# Altium PCB FDMXComunicationModule.PcbDoc
Units mm, origin at the board's own origin, x right, y up, seen from the top; angles counter-clockwise.
Board outline 25.91 x 33.53 mm, 2 copper layers (Top Layer, Bottom Layer); 16 components, 15 nets, 68 pads, 31 vias.
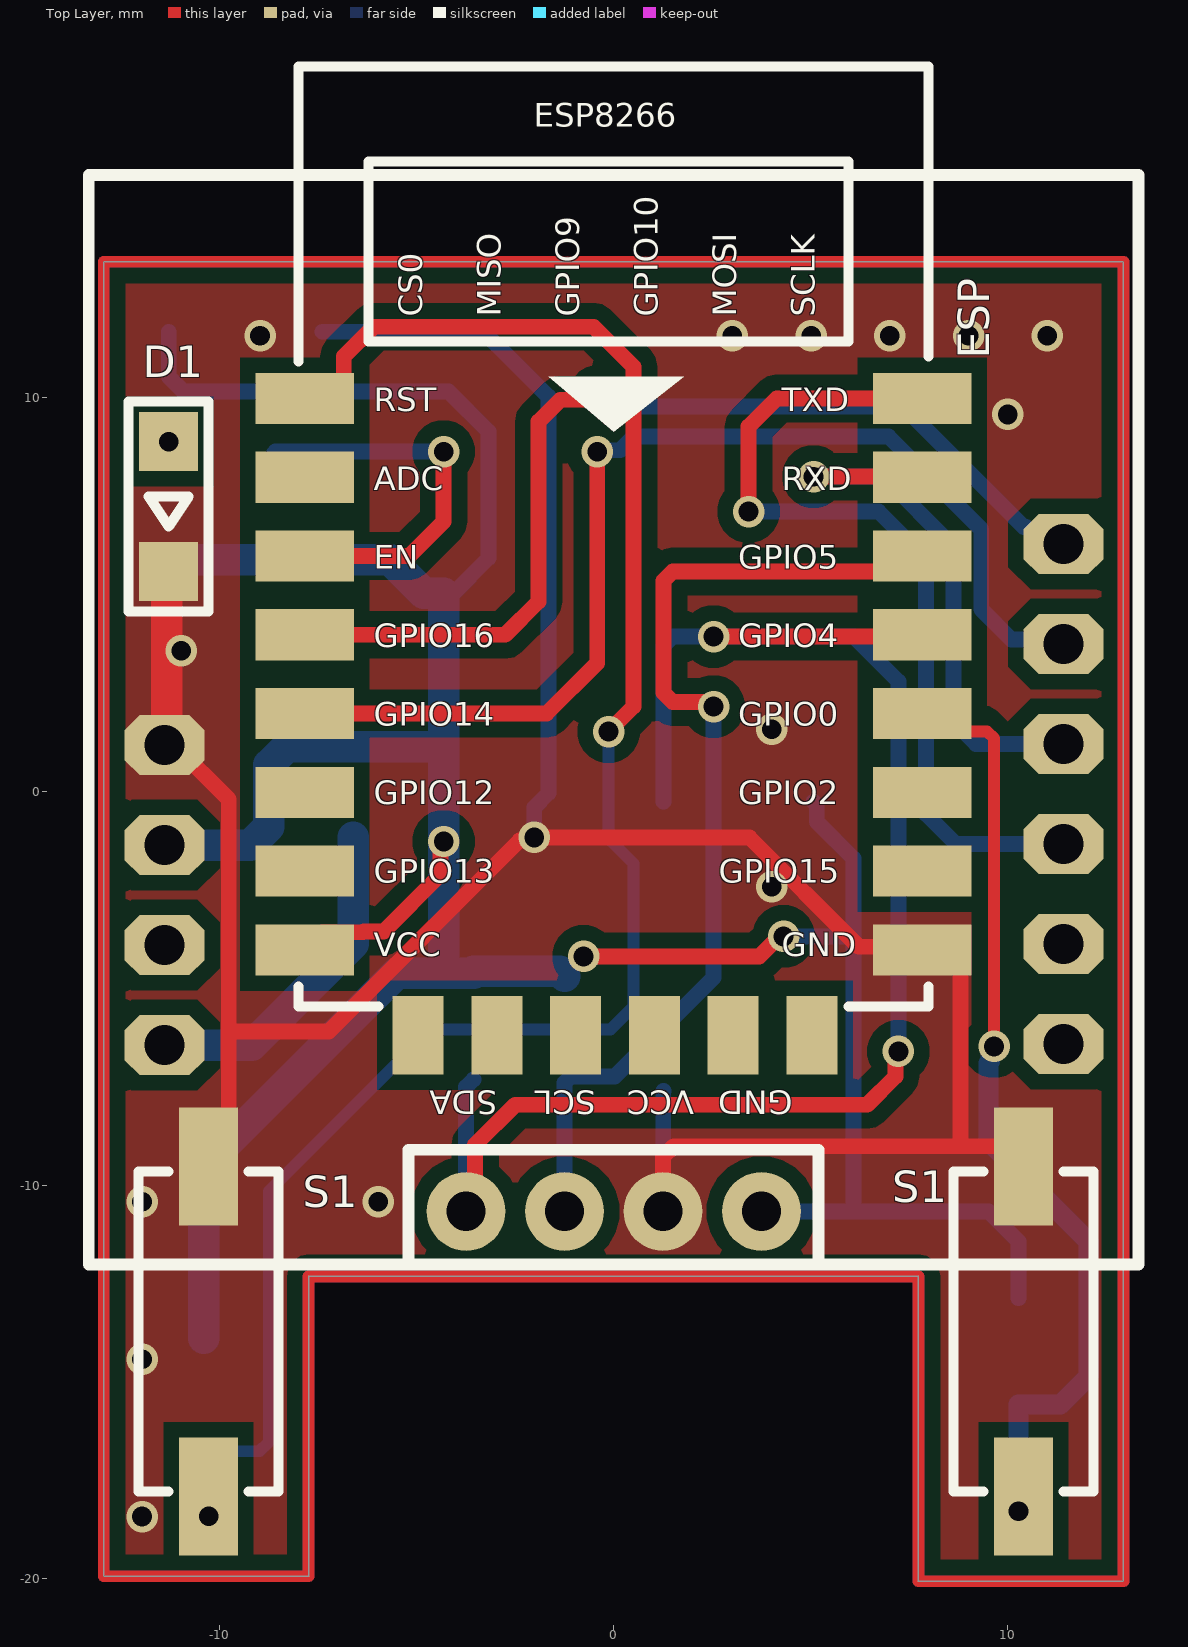
[diagram p0: Top Layer view]
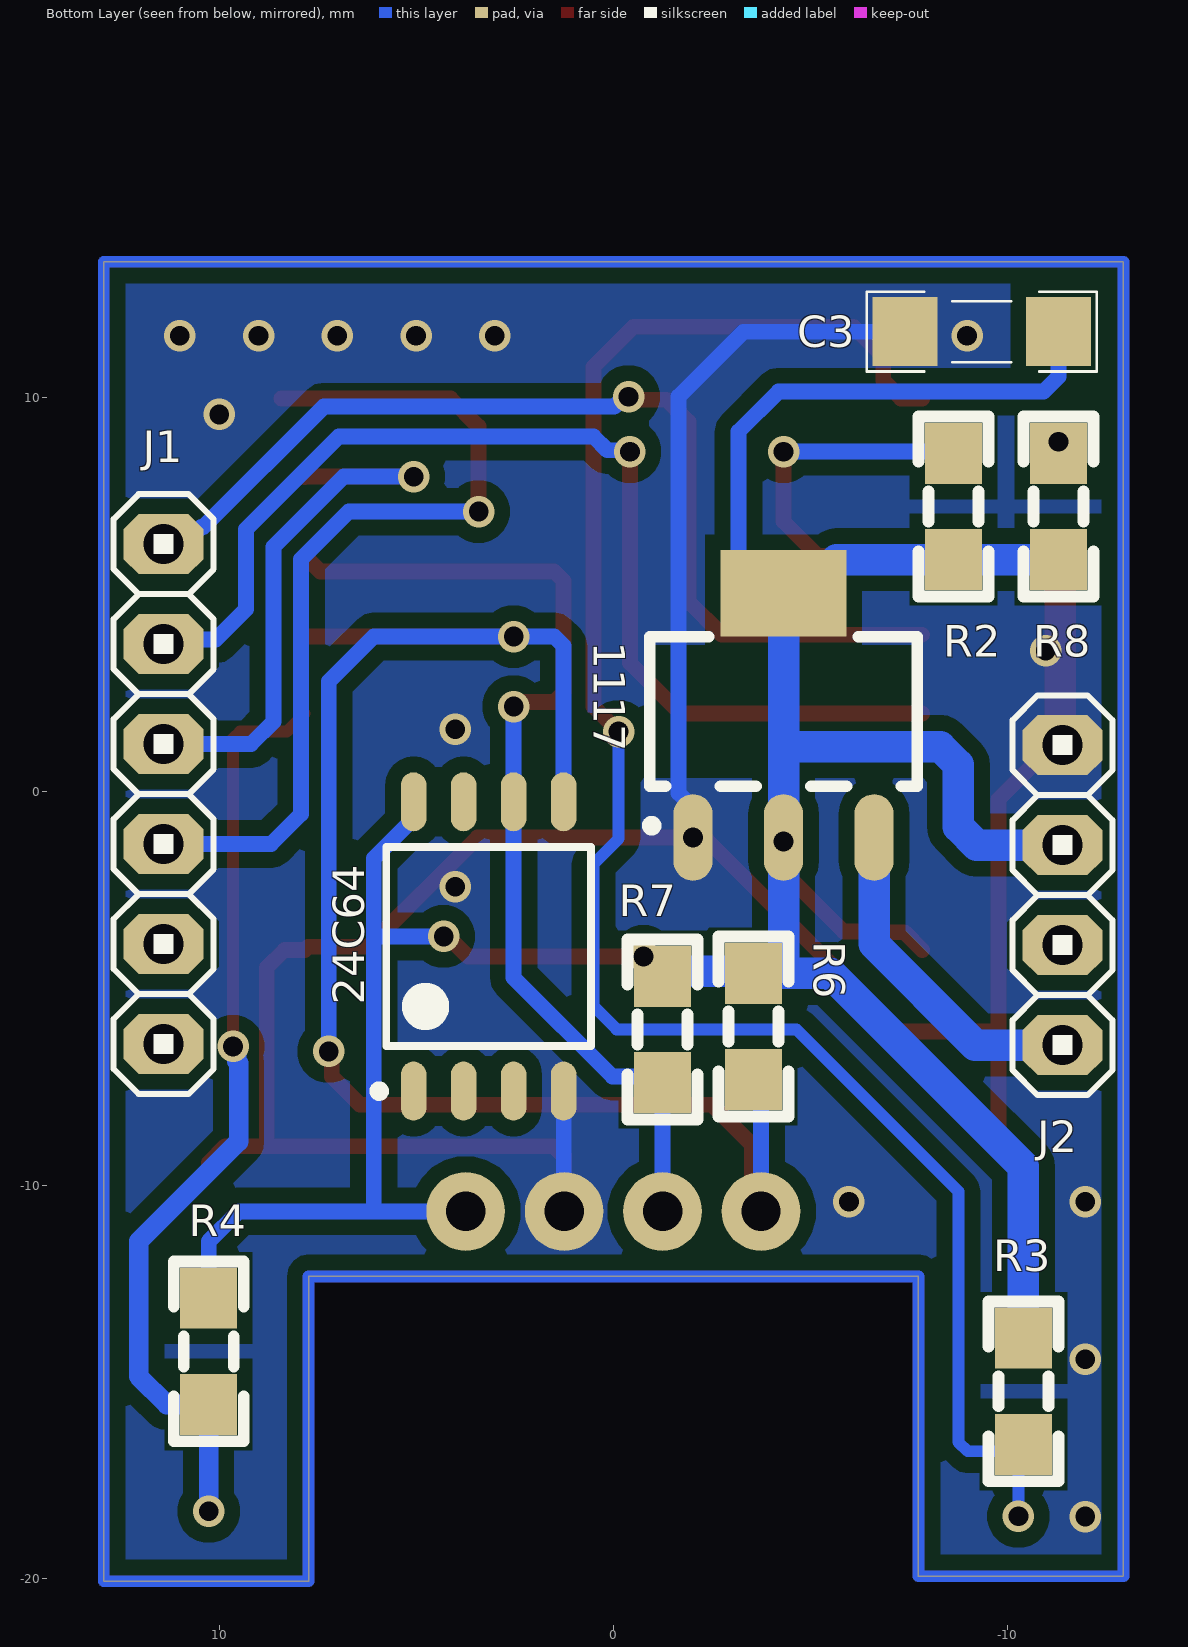
[diagram p1: Bottom Layer view, seen from below]
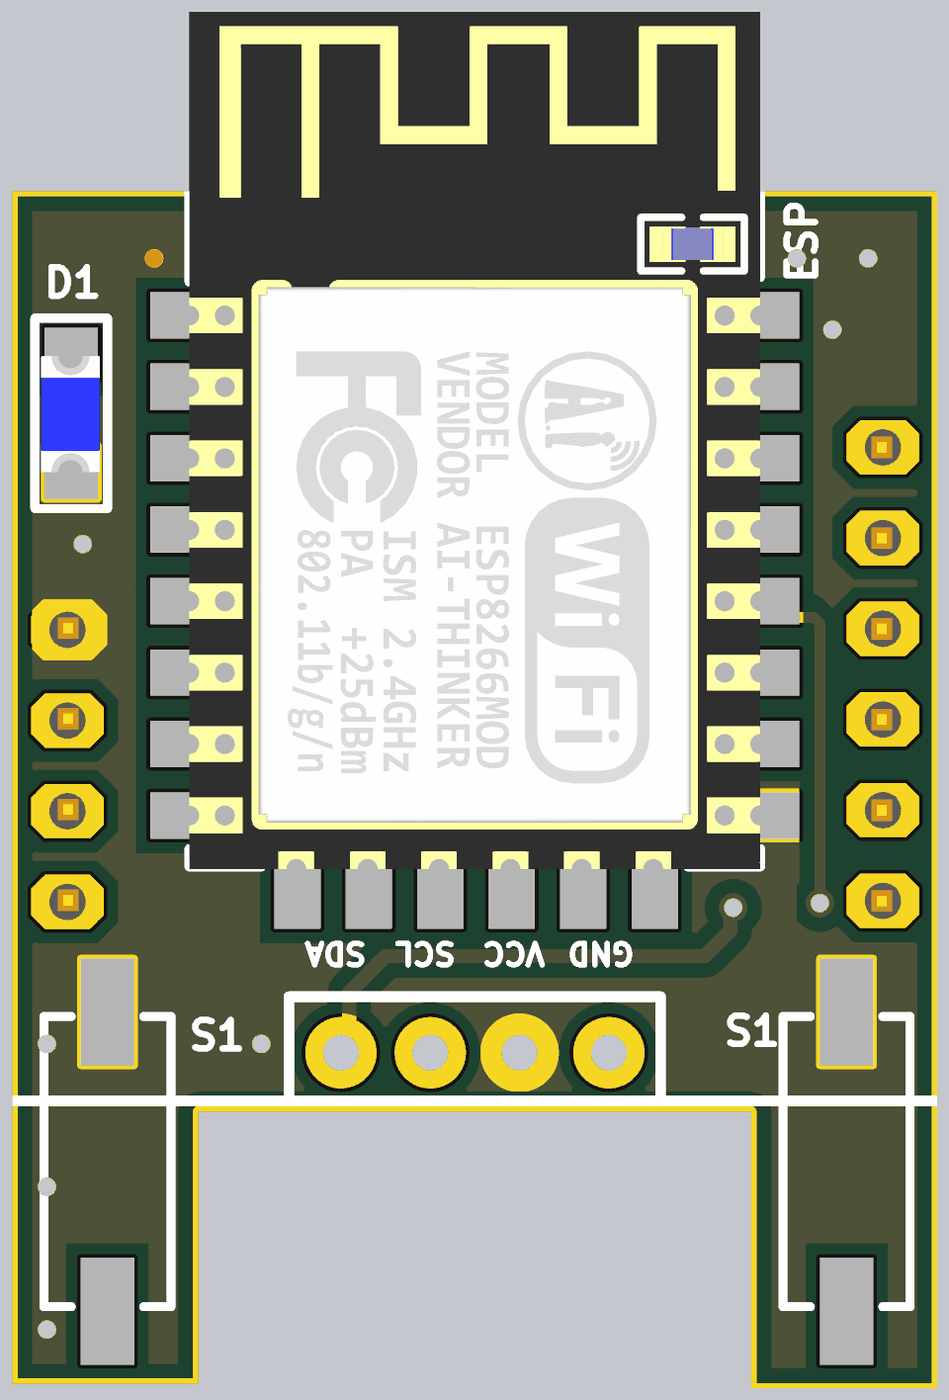
[diagram p2: 3D render of the assembled board from above, using the file's embedded part models]
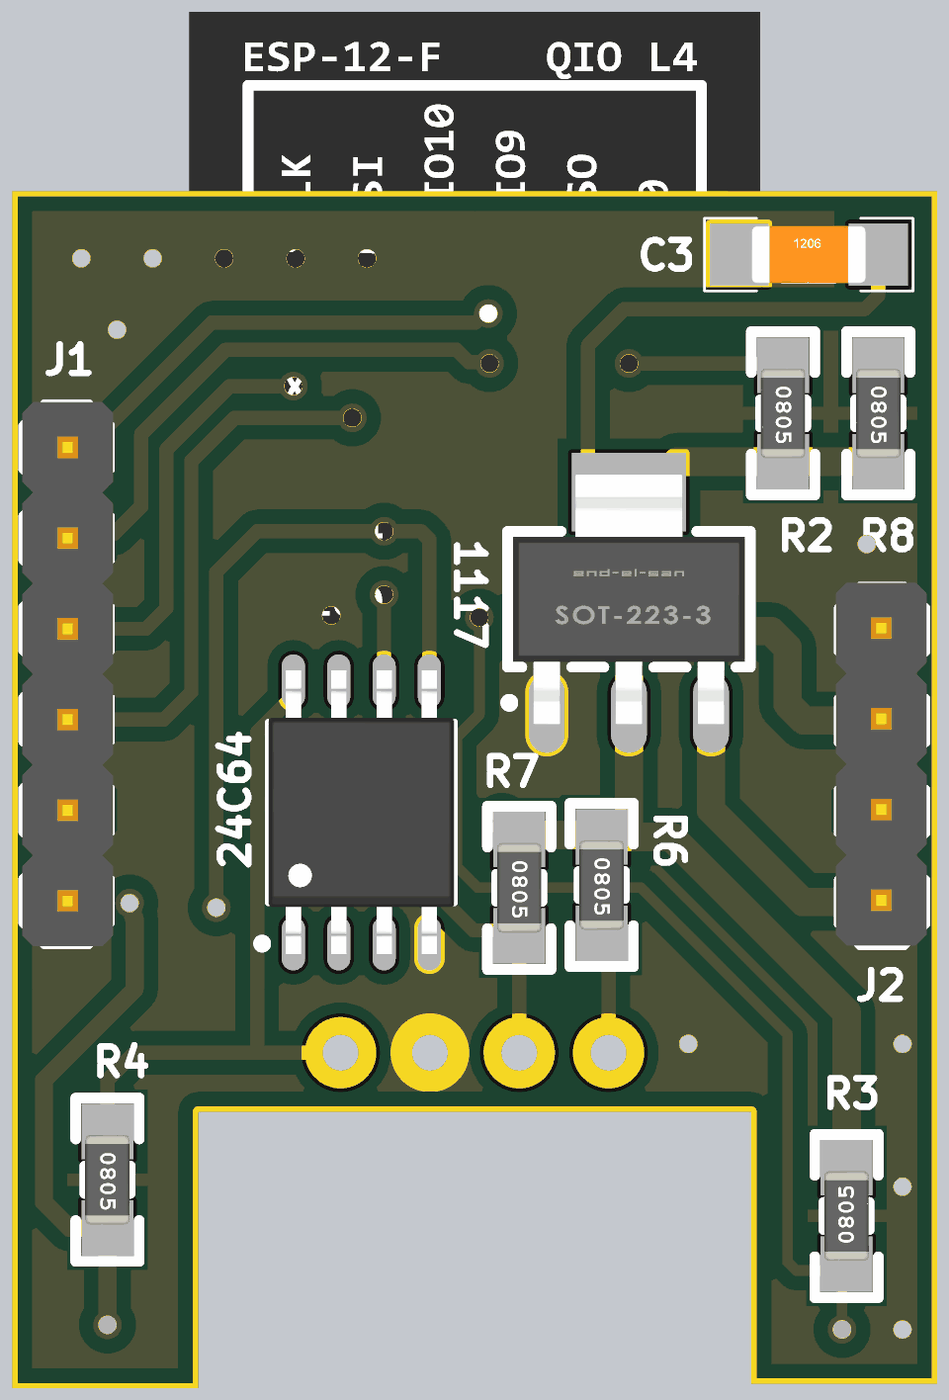
[diagram p3: 3D render of the assembled board from below, using the file's embedded part models]

## Layer stack, top to bottom
Top Solder: solder mask 0.0102, Solder Resist, Dk 3.5
Top Layer: signal copper 0.0356
Dielectric 1: dielectric 0.32, FR-4, Dk 4.8
Bottom Layer: signal copper 0.0356
Bottom Solder: solder mask 0.0102, Solder Resist, Dk 3.5

## Board outline
-12.954,-19.939 -12.954,13.462 12.954,13.462 12.954,-20.066 7.747,-20.066 7.747,-12.319 -7.747,-12.319 -7.747,-19.939

## Design rules (kind name [scope] priority, off if disabled: settings)
Clearance [All] p1: gap=0.4 ignorepadtopadclearanceinfootprint=FALSE except(0: Arc-Hole Track-Hole SMDPad-Hole THPad-Hole Via-Hole Fill-Hole Poly-Hole Region-Hole Text-Hole; 0.254: Arc-THPad Arc-Via Arc-Text Track-THPad Track-Via Track-Text SMDPad-THPad SMDPad-Via SMDPad-Text THPad-THPad THPad-Via THPad-Text Via-Via Via-Text Fill-Text Poly-Text Region-Text Text-Text; 0.3: Arc-Arc Arc-Track Arc-SMDPad Track-Track Track-SMDPad SMDPad-SMDPad)
PlaneConnect [All] p1: planeconnectstyle=Direct reliefexpansion=0.508 reliefentries=4 reliefconductorwidth=0.254 reliefairgap=0.254
PolygonConnect [All] p1: connectstyle=Direct reliefconductorwidth=0.8 reliefentries=4 polygonreliefangle="90 Angle" airgapwidth=0.254
RoutingVias [All] p1: holewidth=0.5 width=0.8 viastyle="Through Hole" minholewidth=0.5 minwidth=0.8 maxholewidth=0.6 maxwidth=1
SolderMaskExpansion [All] p1: expansion=0.102 istentingtop=FALSE
Width [All] p1: maxlimit=10 minlimit=0.3 preferedwidth=1
29 further rules are at their usual default settings.

## Components (designator, comment, footprint, x,y, rotation, side; value= is the part's Value field where it differs from the comment)
24C64 "Comment" 24C64 3.175,-3.937 r90 bottom
1117 "Comment" SOT223 -4.318,2.032 r90 bottom
C3 "Comment" CAPC4817X12N -9.353,11.684 r180 bottom
D1 "Comment" "LED BLUE 1206" -11.303,7.239 r270 top
ESP "Comment" ESP8266 0,6.223 r0 top locked
J1 "Comment" My_1X06 11.433,-0.065 r90 bottom locked
J2 "Comment" My_1X04 -11.407,-2.634 r90 bottom locked
R2 "Comment" RESC3413X04N -8.636,7.239 r270 bottom
R3 "Comment" RESC3413X04N -10.414,-15.24 r90 bottom
R4 "Comment" RESC3413X04N 10.287,-14.224 r270 bottom
R6 "Comment" RESC3413X04N -3.556,-5.969 r270 bottom
R7 "Comment" RESC3413X04N -1.246,-6.049 r270 bottom
R8 "Comment" RESC3413X04N -11.303,7.239 r270 bottom
S1 "Comment" pushbutton -10.287,-13.716 r90 top
S1 "Comment" pushbutton 10.414,-13.716 r90 top
? "Comment" "OLED 0.96inch" 0,1.822 r180 top locked

## Footprints (in the part's own frame and the unit in brackets; to place one, negate y for a bottom-side part, rotate by r counter-clockwise, add the part's x,y. Pads: shape width x height; smd on the part's side, far side on the other; paste and mask are expansions set on the pad)
24C64 [mm] "SOIC, 8-Leads, Body 5.21x5.28mm, Pitch 1.27mm, IPC Medium Density"
  oval 1.5x0.65 smd: 1(-3.675,1.905) 2(-3.675,0.635) 3(-3.675,-0.635) 4(-3.675,-1.905) 5(3.675,-1.905) 6(3.675,-0.635) 7(3.675,0.635) 8(3.675,1.905)
  silkscreen extent -3.8,-2.6 2.53,2.91, body extent -3.98,-2.6 3.98,2.6, height 1.97
CAPC4817X12N [mm] "Chip Capacitor, 2-Leads, Body 4/80x1/70mm, IPC Medium Density-Design:Abbas Basereh"
  rect 1.65x1.75 smd: 1(-1.95,0) 2(1.95,0)
  silkscreen extent -2.92,-1.02 2.92,1.02, body extent -1.6,-0.8 1.6,0.8, height 1
ESP8266 [mm]
  rect 2.5x1.3 smd: 1(-7.845,3.763) 2(-7.845,1.761) 3(-7.845,-0.24) 4(-7.845,-2.242) 5(-7.845,-4.243) 6(-7.845,-6.244) 7(-7.845,-8.246) 8(-7.845,-10.247) 15(7.845,-10.247) 16(7.845,-8.246) 17(7.845,-6.244) 18(7.845,-4.243) 19(7.845,-2.242) 20(7.845,-0.24) 21(7.845,1.761) 22(7.845,3.763)
  rect 1.3x2 smd: 9(-4.967,-12.417) 10(-2.965,-12.417) 11(-0.964,-12.417) 12(1.037,-12.417) 13(3.039,-12.417) 14(5.04,-12.417)
  silkscreen extent -8,-11.68 8,12.19, body extent -8,-11.75 8,12.25, height 3.17
"LED BLUE 1206" [mm]
  rect 1.5x1.5 smd: 1(-1.651,0) 2(1.651,0)
  silkscreen extent -2.67,-1.02 2.67,1.02, body extent -1.61,-0.85 1.66,0.8, height 0.9
My_1X04 [mil]
  oct 60x80 hole 40: 1(-150,0) 2(-50,0) 3(50,0) 4(150,0)
  silkscreen extent -200,-50 200,50, body extent -198,-49 202,51, height 234
My_1X06 [mil]
  oct 60x80 hole 40: 1(-250,0) 2(-150,0) 3(-50,0) 4(50,0) 5(150,0) 6(250,0)
  silkscreen extent -300,-50 300,50, body extent -300,-51 300,49, height 234
"OLED 0.96inch" [mm]
  round 2 hole 1: 1(-3.758,12.49) 2(-1.256,12.49) 3(1.246,12.49) 4(3.748,12.49)
  silkscreen extent -13.34,-13.84 13.34,13.84, body extent -13.5,-14 13.5,14, height 8.01
pushbutton [mm]
  rect 3x1.5 smd: 1(-4.191,0) 2(4.191,0)
  silkscreen extent -4.06,-1.78 4.06,1.78, body extent -4.17,-1.82 4.17,1.82, height 4.25
RESC3413X04N [mm] "Chip Resistor, 2-Leads, Body 3/40x1/30mm, IPC Medium Density-Design:Abbas Basereh"
  rect 1.55x1.45 smd: 1(-1.35,0) 2(1.35,0)
  silkscreen extent -2.29,-0.89 2.29,0.89, body extent -1.25,-0.62 1.25,0.62, height 0.79
SOT223 [mm] "SOT223, 4-Leads, Body 6.5x3.5mm, Pitch 2.30mm-Designer Abbas Basereh"
  oval 2.2x1 smd: 1(-3.2,2.3) 2(-3.2,0) 3(-3.2,-2.3)
  rect 2.2x3.2 smd: 4(3,0)
  Top Layer pour cut-out: -1.7,3.556 1.7,3.556 1.7,-3.556 -1.7,-3.556
  silkscreen extent -3.02,-3.4 1.9,3.48, body extent -3.5,-3.25 3.5,3.25, height 1.7

## Via types
v1: diameter 0.8, hole 0.5, Top Layer to Bottom Layer, tented both sides, 31 vias

## Nets (pads, with @x,y where several pads share a name; then routed paths per layer and width w, separated by ;. In a path a pad name is that pad's centre, name@x,y a point inside that pad or via, vN(x,y) a via of type N, cw(c..) or ccw(c..) an arc to the next point about the centre after c; other vN are vias at no path point)
5v: 
BOOT: 
EN: ESP.3 R2.1 | length 10
  Top Layer w0.4: ESP.3 -5.193,5.983 -4.318,6.858 v1(-4.318,8.636)
  Bottom Layer w0.4: R2.1 -8.589,8.636 v1(-4.318,8.636)
FLASH: ESP.18 R4.2 S1.1@10.414,-17.907 | length 24.2
  Top Layer w0.3: ESP.18 8.301,1.524 9.491,1.524 9.667,1.348 v1(9.667,-6.477)
  Bottom Layer w0.5: v1(9.667,-6.477) 9.571,-6.573 9.571,-6.857 9.525,-6.903 9.525,-8.89 12.065,-11.43 12.065,-14.859 11.35,-15.574 R4.2 v1(10.287,-18.288)
GND: 24C64.4 1117.1 ?.2 C3.1 D1.2 ESP.15 J2.4 S1.2 | length 74.3
  Top Layer w0.4: J2.4 -11.153,1.176 -9.779,-0.199 -9.779,-6.096 ; S1.2@-10.287,-9.525 -9.779,-9.017 -9.779,-6.096 ; ?.2 1.256,-9.285 1.527,-9.014 8.813,-9.014 ; S1.2@10.287,-9.437 9.864,-9.014 8.813,-9.014 ; -9.779,-6.096 -7.239,-6.096 -2.388,-1.245 -2.095,-1.245 v1(-2.018,-1.168) 3.454,-1.168 6.23,-3.944 7.765,-3.944 ESP.15 8.363,-4.024 8.813,-4.474 8.813,-9.014
  Top Layer w0.8: J2.4 -11.355,1.228 -11.355,5.536 D1.2
  Bottom Layer w0.4: C3.1 -3.302,11.684 -1.651,10.033 -1.651,-0.039 -2.018,-0.406 v1(-2.018,-1.168) ; ?.2 1.263,-10.661 1.263,-7.619 24C64.4
  other v1: -11.981,-18.421 -11.981,-14.421 -11.981,-10.421 -5.981,-10.421 4.019,-2.421 4.019,1.579 -10.981,3.579 10.019,9.579 -8.981,11.579 3.019,11.579 5.019,11.579 7.019,11.579 9.019,11.579 11.019,11.579
OUT1: ESP.4 J1.6 | length 26
  Top Layer w0.4: ESP.4 -2.75,3.981 -1.905,4.826 -1.905,9.398 -1.347,9.956 -0.458,9.956 v1(-0.381,10.033)
  Bottom Layer w0.4: v1(-0.381,10.033) -0.273,10.033 -0.019,9.779 7.366,9.779 10.424,6.721 10.478,6.721 10.915,6.285 J1.6
OUT2: ESP.5 J1.5 | length 28.7
  Top Layer w0.4: ESP.5 -1.703,1.98 -0.416,3.267 v1(-0.416,8.636)
  Bottom Layer w0.4: v1(-0.416,8.636) -0.38,8.672 0.163,8.672 0.508,9.017 6.985,9.017 9.339,6.663 9.339,4.631 10.106,3.864 11.313,3.864 J1.5
RES1: D1.1 R8.1
  other v1: -11.303,8.89
RST: ESP.1 R3.1 S1.1@-10.287,-17.907 | length 47.8
  Top Layer w0.4: ESP.1 -7.303,9.986 -6.853,10.436 -6.853,11.054 -6.096,11.811 -0.508,11.811 0.508,10.795 0.508,2.159 v1(-0.127,1.524)
  Bottom Layer w0.3: R3.1 R3.1@-10.287,-16.717 ; v1(-10.287,-18.415) R3.1@-10.287,-16.717 ; v1(-0.127,1.524) -0.127,-1.197 0.508,-1.832 0.508,-5.461 -0.075,-6.044 -4.647,-6.044 -8.763,-10.16 -8.763,-16.53 -8.997,-16.764 -10.24,-16.764 R3.1@-10.287,-16.717
RX: ESP.21 J1.4 | length 14.5
  Top Layer w0.4: v1(5.08,8.001) 7.829,8.001 ESP.21
  Bottom Layer w0.4: v1(5.08,8.001) 6.858,8.001 8.639,6.22 8.639,1.775 9.209,1.205 J1.4
SCL: 24C64.6 ?.3 ESP.20 R7.2 | length 26.1
  Top Layer w0.4: v1(2.54,2.159) 2.425,2.274 1.504,2.274 1.27,2.508 1.27,5.354 1.504,5.588 7.451,5.588 ESP.20
  Bottom Layer w0.4: ?.3 R7.2 -1.088,-7.241 0.028,-7.241 2.54,-4.729 24C64.6 v1(2.54,2.159)
SDA: 24C64.5 ?.4 ESP.19 R6.2 | length 42.5
  Top Layer w0.4: ?.4 -3.518,-10.438 -3.518,-8.978 -2.5,-7.96 6.445,-7.96 7.162,-7.243 7.162,-6.681 v1(7.239,-6.604) ; v1(2.54,3.937) 7.801,3.937 ESP.19
  Bottom Layer w0.4: ?.4 -3.748,-7.511 R6.2 ; 24C64.5 1.27,3.703 1.504,3.937 v1(2.54,3.937) 6.096,3.937 7.239,2.794 v1(7.239,-6.604)
TX: ESP.22 J1.3 | length 22.8
  Top Layer w0.4: v1(3.429,7.112) 3.429,9.271 4.144,9.986 ESP.22 ESP.22@8.445,9.986
  Bottom Layer w0.4: v1(3.429,7.112) 6.731,7.112 7.939,5.904 7.939,-0.573 8.701,-1.335 J1.3
VCC: 24C64.8 1117.2 1117.4 ?.1 C3.2 ESP.8 J2.3 R2.2 R3.2 R4.1 R6.1 R7.1 R8.2 | length 87.6
  Top Layer w0.4: ESP.8 -7.395,-3.574 -6.368,-3.574 -6.35,-3.556 -5.842,-3.556 -4.395,-2.109 -4.395,-1.347 v1(-4.318,-1.27) ; v1(-0.762,-4.191) 3.702,-4.191 4.21,-3.683 v1(4.318,-3.683)
  Bottom Layer w0.4: C3.2 -11.303,10.541 -10.922,10.16 -4.191,10.16 -3.175,9.144 -3.175,5.932 -4.075,5.032 1117.4 ; ?.1 6.096,-10.668 ; v1(4.318,-3.683) 5.969,-3.683 6.096,-3.556 ; 24C64.8 5.162,-0.344 5.162,-0.769 6.096,-1.703 6.096,-3.556 ; R4.1 10.287,-11.43 9.525,-10.668 6.096,-10.668 ; 6.096,-10.668 6.096,-3.556
  Bottom Layer w0.8: J2.3 -9.232,-1.364 -8.763,-0.896 -8.763,0.674 -8.294,1.143 -4.318,1.143 ; R8.2 R2.2 -5.675,5.889 -4.818,5.032 1117.4 -4.318,1.143 ; R3.2 -10.414,-9.525 -5.508,-4.619 R6.1 ; -4.318,-4.572 1117.2 ; v1(-4.318,-1.27) 1117.2 ; R6.1@-3.556,-4.572 -1.373,-4.572 R7.1 ; 1117.2 -4.318,1.143
VIN: 1117.3 J2.1 | length 8.6
  Bottom Layer w0.8: J2.1 -9.191,-6.444 -6.618,-3.871 1117.3
pads on no net: 24C64.1 24C64.2 24C64.3 24C64.7 ESP.2 ESP.6 ESP.7 ESP.9 ESP.10 ESP.11 ESP.12 ESP.13 ESP.14 ESP.16 ESP.17 J1.1 J1.2 J2.2
copper on no net: | length 268.2
  Top Layer w0.3: -12.954,-19.939 -7.747,-19.939 -7.747,-12.319 7.747,-12.319 7.747,-20.066 12.954,-20.066 12.954,13.462 -12.954,13.462 -12.954,-19.939
  Bottom Layer w0.3: -12.954,-19.939 -7.747,-19.939 -7.747,-12.319 7.747,-12.319 7.747,-20.066 12.954,-20.066 12.954,13.462 -12.954,13.462 -12.954,-19.939

## Polygon pours and split planes (outlines as drawn)
GND on Bottom Layer "GND_L02_P001" (solid, pour order 1): -12.954,-19.939 -12.954,13.462 12.954,13.462 12.954,-20.066 7.747,-20.066 7.747,-12.319 -7.747,-12.319 -7.747,-19.939
GND on Top Layer "GND_L01_P000" (solid, pour order 0): -12.954,-19.939 -12.954,13.462 12.954,13.462 12.954,-20.066 7.747,-20.066 7.747,-12.319 -7.747,-12.319 -7.747,-19.939

## Silkscreen, mask and mechanical layers (free items; w line width, h text height)
Top Solder:
  the board outline again, w0.3
Bottom Solder:
  the board outline again, w0.3
Mechanical 1:
  the board outline again, w0.3

## Text inside footprints (layer, text, board x,y; h text height)
ESP: Top Overlay "GND" at 4.269,-4.188 h0.6; Top Overlay "GPIO15" at 2.67,-2.319 h0.6; Top Overlay "GPIO2" at 3.17,-0.324 h0.6; Top Overlay "GPIO0" at 3.17,1.672 h0.6; Top Overlay "GPIO4" at 3.17,3.668 h0.6; Top Overlay "GPIO5" at 3.17,5.664 h0.6; Top Overlay "RXD" at 4.269,7.659 h0.6; Top Overlay "TXD" at 4.269,9.655 h0.6; Top Overlay "VCC" at -6.093,-4.188 h0.6; Top Overlay "GPIO13" at -6.093,-2.319 h0.6; Top Overlay "GPIO12" at -6.093,-0.324 h0.6; Top Overlay "GPIO14" at -6.093,1.672 h0.6; Top Overlay "GPIO16" at -6.093,3.668 h0.6; Top Overlay "EN" at -6.093,5.664 h0.6; Top Overlay "ADC" at -6.093,7.659 h0.6; Top Overlay "RST" at -6.093,9.655 h0.6; Top Overlay "SCLK" at 5.113,12.068 h0.6 r90; Top Overlay "MOSI" at 3.118,12.068 h0.6 r90; Top Overlay "GPIO10" at 1.122,12.068 h0.6 r90; Top Overlay "GPIO9" at -0.874,12.068 h0.6 r90; Top Overlay "MISO" at -2.87,12.068 h0.6 r90; Top Overlay "CS0" at -4.865,12.068 h0.6 r90; Top Overlay "ESP8266" at -2.029,16.894 h0.6
?: Top Overlay "GND" at 4.549,-7.599 h0.6 r180; Top Overlay "VCC" at 2.047,-7.599 h0.6 r180; Top Overlay "SCL" at -0.454,-7.599 h0.6 r180; Top Overlay "SDA" at -2.956,-7.599 h0.6 r180